# Altium PCB AC225-16A-MHCW05P-B_V1.0.PcbDoc
Units mm, origin at the board's own origin, x right, y up, seen from the top; angles counter-clockwise.
Board outline 34.42 x 23.11 mm, 2 copper layers (Top Layer, Bottom Layer); 9 components, 9 nets, 58 pads, 85 vias.
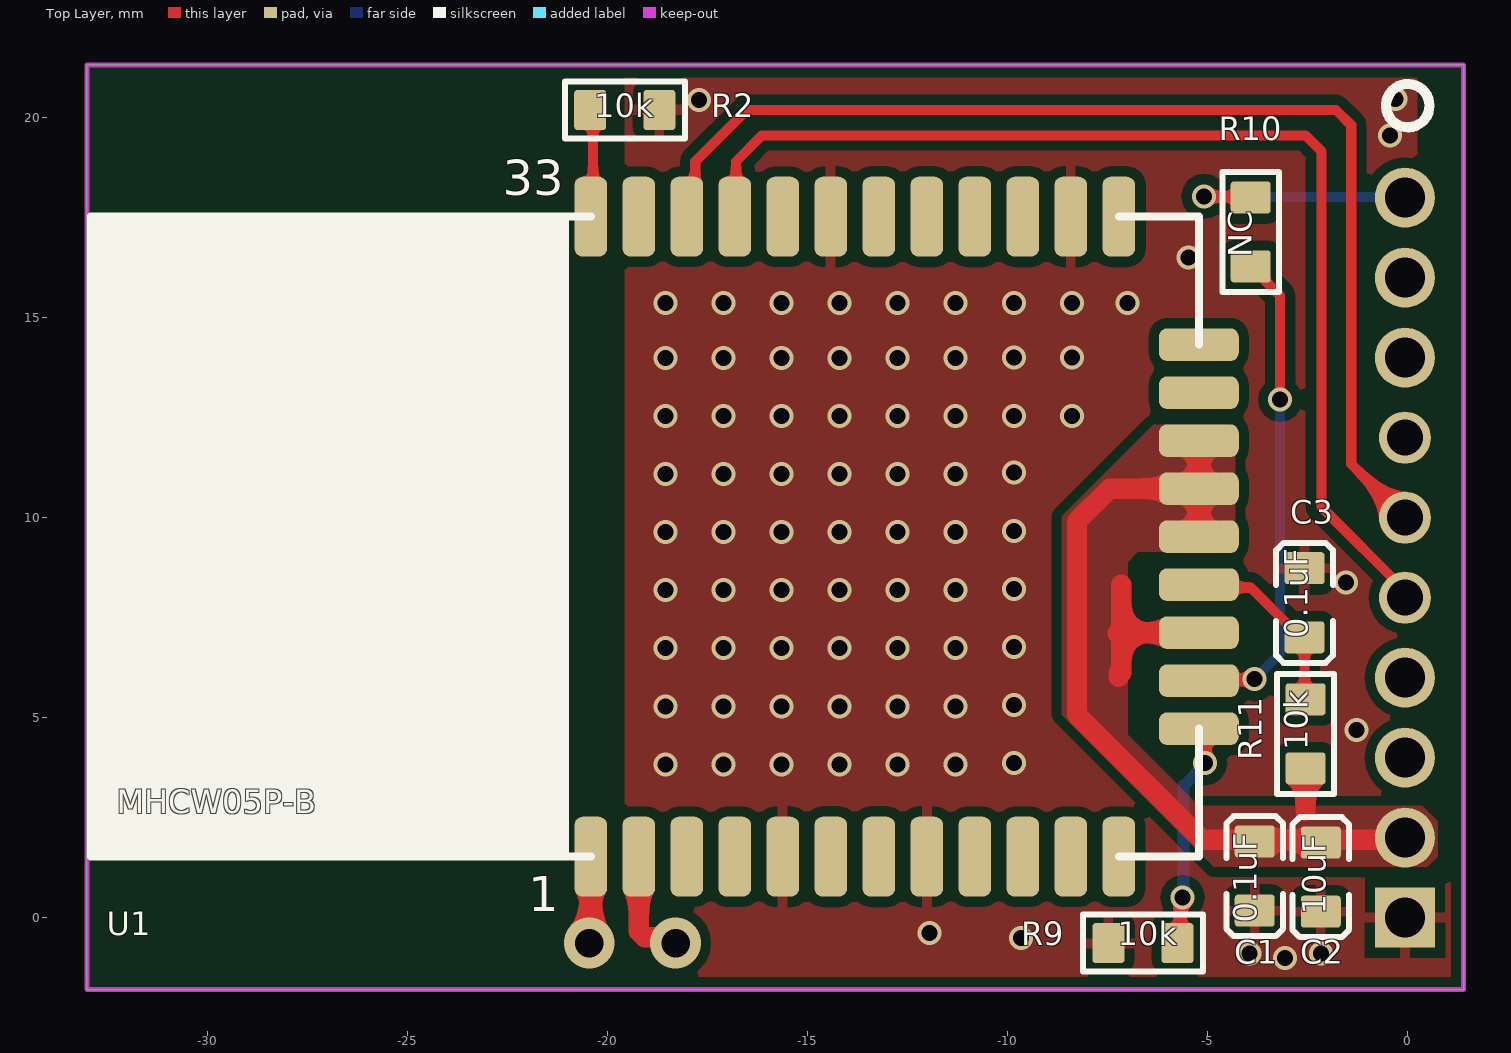
[diagram p0: Top Layer view]
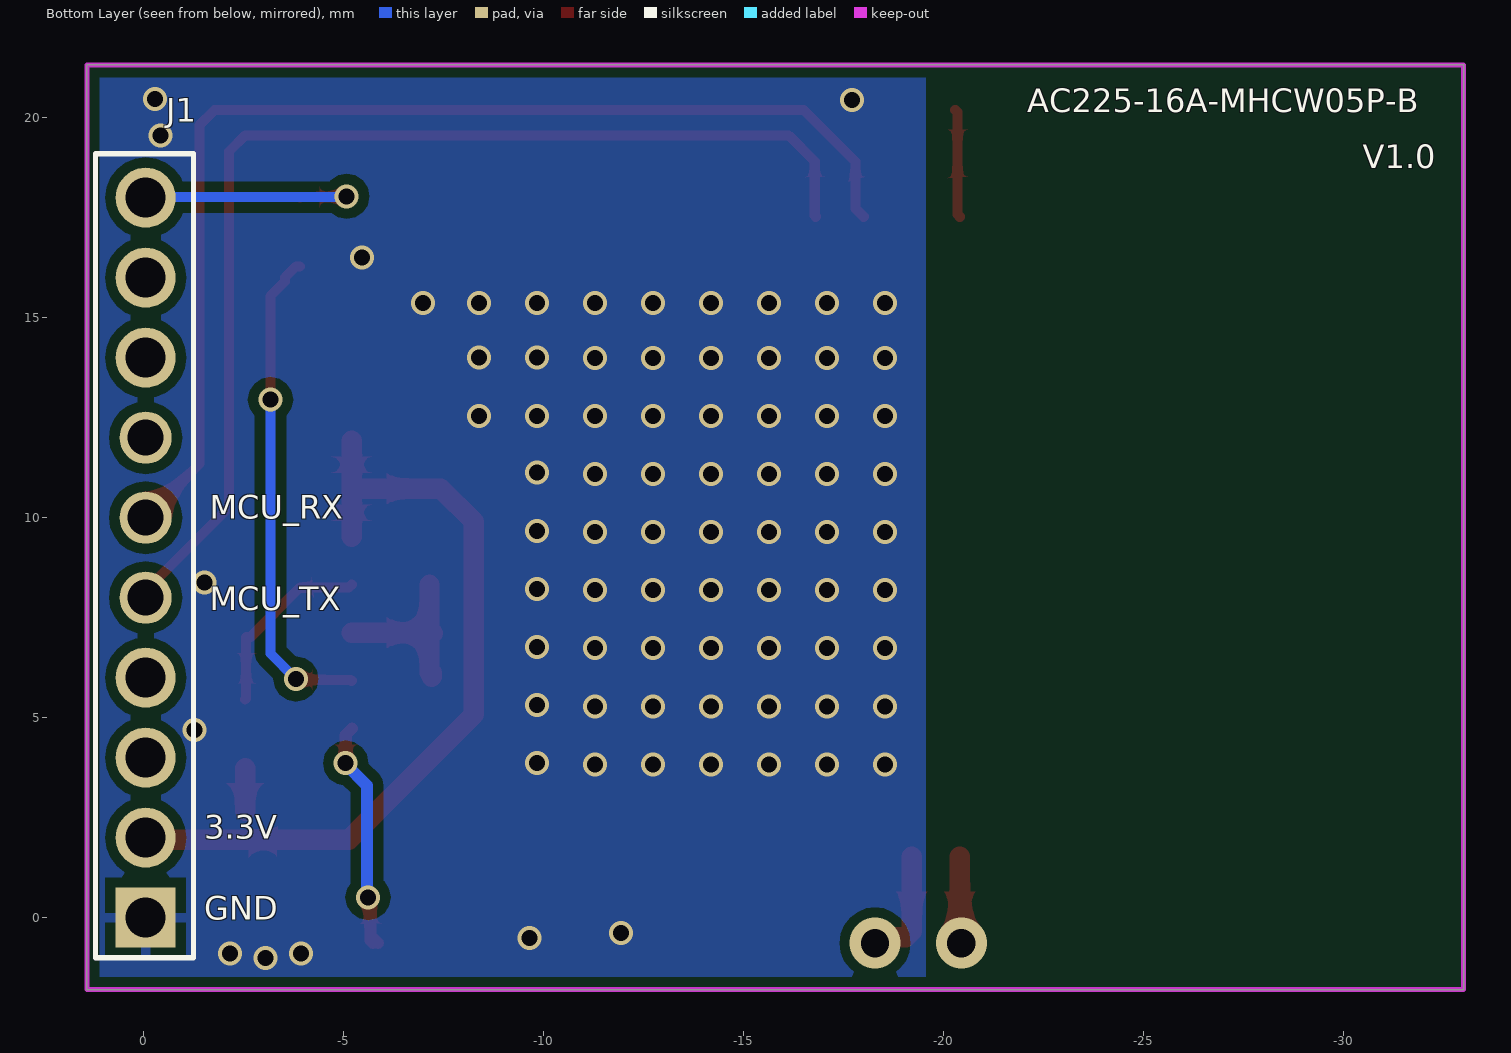
[diagram p1: Bottom Layer view, seen from below]
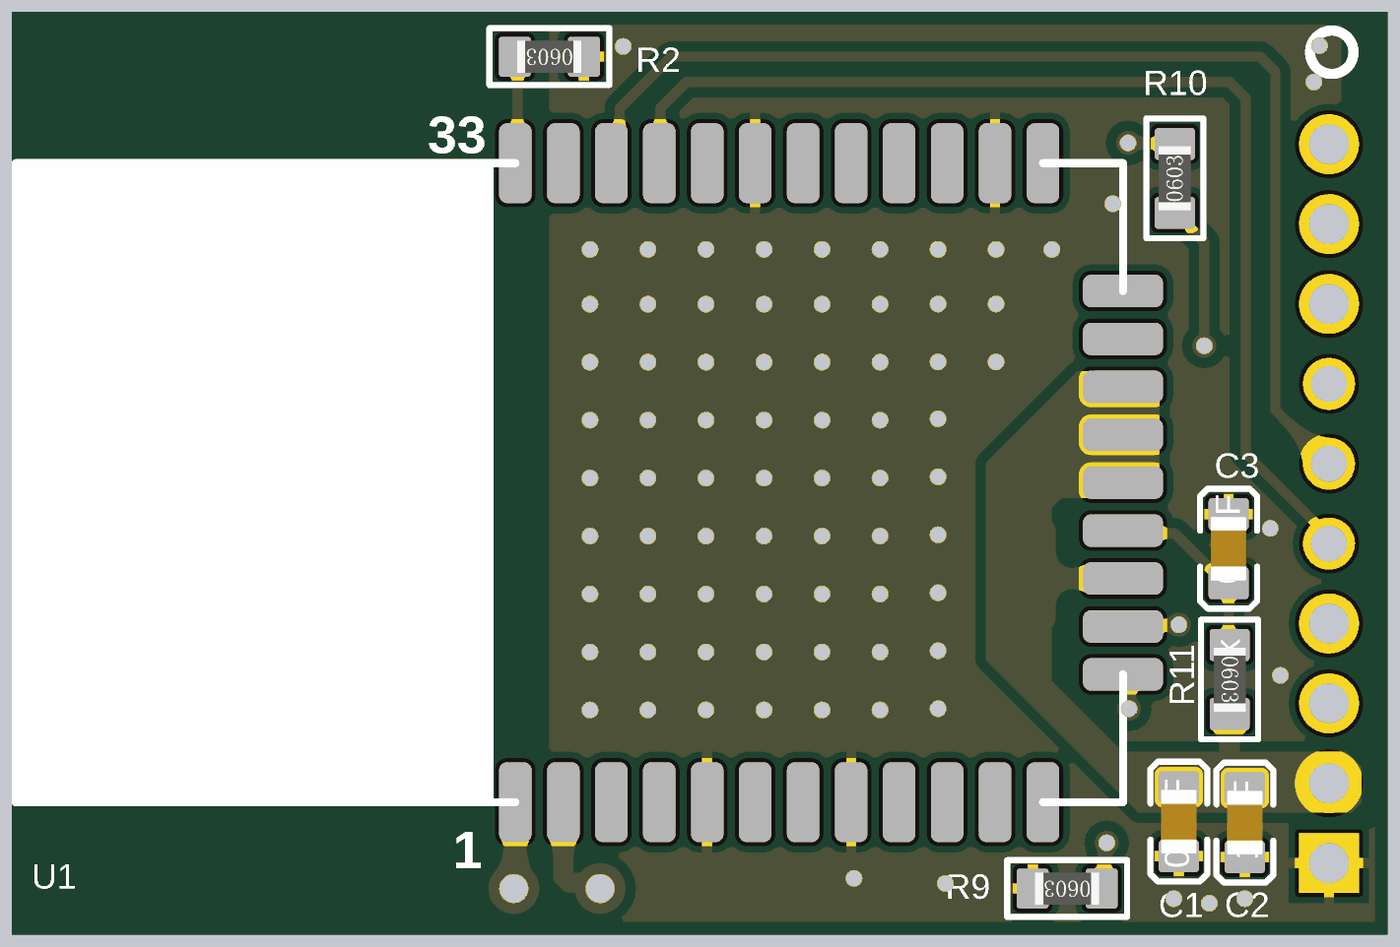
[diagram p2: 3D render of the assembled board from above, using the file's embedded part models]

## Layer stack, top to bottom
Top Solder: solder mask 0.0102, Solder Resist, Dk 3.5
Top Layer: signal copper 0.0356
Dielectric 1: dielectric 0.32, FR-4, Dk 4.8
Bottom Layer: signal copper 0.0356
Bottom Solder: solder mask 0.0102, Solder Resist, Dk 3.5

## Board outline
-33.004,-1.795 -33.004,21.319 1.413,21.319 1.413,-1.795

## Design rules (kind name [scope] priority, off if disabled: settings)
Clearance [All] p1: gap=0.254 ignorepadtopadclearanceinfootprint=FALSE except(0: Arc-Hole Track-Hole SMDPad-Hole THPad-Hole Via-Hole Fill-Hole Poly-Hole Region-Hole Text-Hole)
PolygonConnect [All] p1: connectstyle=Direct reliefconductorwidth=0.254 reliefentries=4 polygonreliefangle="90 Angle" airgapwidth=0.254
RoutingVias [All] p1: holewidth=0.711 width=1.27 viastyle="Through Hole" minholewidth=0.003 minwidth=0.003 maxholewidth=12.7 maxwidth=12.7
SolderMaskExpansion [All] p1: expansion=0.102
Width [All] p1: maxlimit=15.24 minlimit=0.254 preferedwidth=0.254
30 further rules are at their usual default settings.

## Components (designator, comment, footprint, x,y, rotation, side; value= is the part's Value field where it differs from the comment)
C1 "0.1uF" C-0603 -3.81,1.041 r270 top
C2 "10uF" C-0603 -2.159,1.016 r270 top
C3 "0.1uF" C-0603 -2.565,7.874 r90 top
J1 "CON10" DIP_10 0.946,9 r90 bottom
R2 "10k" R-0603 -19.558,20.193 r180 top
R9 "10k" R-0603 -6.604,-0.635 r180 top
R10 "NC" R-0603 -3.91,17.145 r90 top
R11 "10k" R-0603 -2.54,4.597 r270 top
U1 "MHCW05P-B" MHCW05P-B -20.408,1.526 r90 top locked

## Footprints (in the part's own frame and the unit in brackets; to place one, negate y for a bottom-side part, rotate by r counter-clockwise, add the part's x,y. Pads: shape width x height; smd on the part's side, far side on the other; paste and mask are expansions set on the pad)
C-0603 [mm]
  rrect20% 0.8x1 smd: 1(-0.864,0) 2(0.864,0)
  silkscreen extent -1.5,-0.71 1.5,0.71, body extent -0.8,-0.45 0.8,0.45, height 0.8
DIP_10 [mm]
  rect 1.5x1.5 hole 1: 1(-9,-1)
  round 1.5 hole 1: 2(-7,-1) 3(-5,-1) 4(-3,-1) 8(5,-1) 9(7,-1) 10(9,-1)
  round 1.3 hole 0.9: 5(-1,-1) 6(1,-1) 7(3,-1)
  silkscreen extent -10,-2.2 10.1,0.25
MHCW05P-B [mm]
  rrect50% 2x0.813 smd: 1(0,0) 2(0,-1.2) 3(0,-2.4) 4(0,-3.6) 5(0,-4.8) 6(0,-6) 7(0,-7.2) 8(0,-8.4) 9(0,-9.6) 10(0,-10.8) 11(0,-12) 12(0,-13.2) 22(16,-13.2) 23(16,-12) 24(16,-10.8) 25(16,-9.6) 26(16,-8.4) 27(16,-7.2) 28(16,-6) 29(16,-4.8) 30(16,-3.6) 31(16,-2.4) 32(16,-1.2) 33(16,0)
  oval 0.813x2 smd: 13(3.2,-15.2)
  rrect50% 0.813x2 smd: 13(3.2,-15.2) 14(4.4,-15.2) 15(5.6,-15.2) 16(6.8,-15.2) 17(8,-15.2) 18(9.2,-15.2) 19(10.4,-15.2) 20(11.6,-15.2) 21(12.8,-15.2)
  silkscreen extent 0,-15.2 16,12.5, body extent 0,-15.11 16,12.45, height 2
R-0603 [mm] "适用于贴片0603（1608）封装电阻 1/8W"
  rrect20% 0.8x1 smd: 1(-0.864,0) 2(0.864,0)
  silkscreen extent -1.5,-0.71 1.5,0.71, body extent -0.8,-0.4 0.8,0.4, height 0.45

## Part data
C1 C2 C3: library part CAP
R2 R9 R10 R11: library part RES2

## Via types
v1: diameter 0.6, hole 0.4, Top Layer to Bottom Layer, tented both sides, 83 vias
v2: diameter 1.27, hole 0.711, Top Layer to Bottom Layer, tented both sides, 2 vias

## Nets (pads, with @x,y where several pads share a name; then routed paths per layer and width w, separated by ;. In a path a pad name is that pad's centre, name@x,y a point inside that pad or via, vN(x,y) a via of type N, cw(c..) or ccw(c..) an arc to the next point about the centre after c; other vN are vias at no path point)
EXT_PWR_EN: J1.10 R10.2 | length 6.2
  Top Layer w0.254: v1(-5.08,18.034) -5.068,18.022 -3.923,18.022 R10.2
  Bottom Layer w0.254: v1(-5.08,18.034) -5.063,18.017 -0.071,18.017 J1.10
GND: C1.2 C2.2 C3.2 J1.1 R2.1 R9.2 U1.5 U1.8 U1.23 U1.28
  other v1: -3.048,-1.004 -3.937,-0.889 -2.159,-0.889 -9.652,-0.508 -11.938,-0.381 -18.542,3.835 -17.091,3.835 -15.639,3.835 -14.188,3.835 -12.736,3.835 -11.285,3.835 -9.833,3.867 -1.27,4.699 -18.542,5.286 -17.091,5.286 -15.639,5.286 -14.188,5.286 -12.736,5.286 -11.285,5.286 -9.833,5.319 -18.542,6.738 -17.091,6.738 -15.639,6.738 -14.188,6.738 -12.736,6.738 -11.285,6.738 -9.833,6.77 -18.542,8.189 -17.091,8.189 -15.639,8.189 -14.188,8.189 -12.736,8.189 -11.285,8.189 -9.833,8.222 -1.524,8.382 -18.542,9.641 -17.091,9.641 -15.639,9.641 -14.188,9.641 -12.736,9.641 -11.285,9.641 -9.833,9.673 -18.542,11.092 -17.091,11.092 -15.639,11.092 -14.188,11.092 -12.736,11.092 -11.285,11.092 -9.833,11.125 -18.542,12.543 -17.091,12.543 -15.639,12.543 -14.188,12.543 -12.736,12.543 -11.285,12.543 -9.833,12.549 -8.382,12.549 -18.542,13.995 -17.091,13.995 -15.639,13.995 -14.188,13.995 -12.736,13.995 -11.285,13.995 -9.833,14 -8.382,14 -18.542,15.367 -17.091,15.367 -15.639,15.367 -14.188,15.367 -12.736,15.367 -11.285,15.367 -9.833,15.367 -8.382,15.367 -6.985,15.367 -5.461,16.51 -0.429,19.558 -17.709,20.447 -0.29,20.468
NetC3_1: C3.1 R11.1 U1.16 | length 4.7
  Top Layer w0.254: U1.16 -5.137,8.255 -3.91,8.255 -2.665,7.01 C3.1 -2.565,5.486 R11.1
NetJ1_5: J1.5 U1.30 | length 28.5
  Top Layer w0.254: U1.30 -16.78,17.554 -16.78,18.907 -16.129,19.558 -2.54,19.558 -2.137,19.155 -2.137,10.265 -0.054,8.182 J1.5
NetJ1_6: J1.6 U1.31 | length 28.9
  Top Layer w0.254: U1.31 -17.796,17.738 -17.796,18.907 -16.51,20.193 -1.778,20.193 -1.397,19.812 -1.397,11.343 J1.6
NetR2_2: R2.2 U1.33 | length 2.7
  Top Layer w0.254: U1.33 -20.352,17.582 -20.352,20.137 R2.2@-20.295,20.193
NetR9_1: R9.1 U1.13 | length 6
  Top Layer w0.3: R9.1@-5.867,-0.635 R9.1@-5.671,-0.438 ; R9.1 -5.671,-0.565 R9.1@-5.671,-0.438 ; v1(-5.613,0.508) -5.671,0.451 R9.1@-5.671,-0.438 ; U1.13@-5.208,4.726 -5.055,4.573 v1(-5.055,3.867)
  Bottom Layer w0.3: v1@-5.588,0.508 -5.588,3.302 -5.055,3.835 v1(-5.055,3.867)
NetR10_1: R10.1 U1.14 | length 12.4
  Top Layer w0.254: U1.14 -5.186,5.948 -3.831,5.948 v1(-3.81,5.969) ; R10.1 -3.81,16.281 -3.537,16.008 -3.537,15.908 -3.175,15.546 v1(-3.175,12.954)
  Bottom Layer w0.254: v1(-3.81,5.969) -3.175,6.604 v1(-3.175,12.954)
P3V3: C1.1 C2.1 J1.2 R11.2 U1.15 U1.17 U1.18 U1.19 | length 25.6
  Top Layer w0.508: -7.239,7.112 -7.225,7.126 -7.148,7.126 ; -7.208,6.022 -7.208,6.122 -7.148,6.122 -7.148,7.126 ; -7.148,8.326 -7.148,7.126 ; U1.15 -7.148,7.126 ; U1.17 U1.18 ; U1.19 U1.18 ; -2.54,2.667 R11.2 ; J1.2 -0.101,1.953 -2.159,1.953 -3.81,1.953 -5.128,1.953 -8.255,5.08 -8.255,9.906 -7.435,10.726 U1.18
pads on no net: J1.3 J1.4 J1.7 J1.8 J1.9 U1.1 U1.2 U1.3 U1.4 U1.6 U1.7 U1.9 U1.10 U1.11 U1.12 U1.20 U1.21 U1.22 U1.24 U1.25 U1.26 U1.27 U1.29 U1.32
copper on no net: | length 5.2
  Top Layer w0.508: v2(-20.447,-0.635) -20.447,-0.489 -20.408,-0.45 -20.408,-0.236 -20.408,1.526 ; -19.208,1.526 -19.208,-0.337 -19.056,-0.489 -18.434,-0.489 v2(-18.288,-0.635)
  Bottom Layer w0.508: v2(-20.447,-0.635) v2@-20.32,-0.635

## Polygon pours and split planes (outlines as drawn)
GND on Top Layer "GND_L01_P004" (solid, remove dead copper, pour order 4): -19.558,21.319 0.254,21.319 0.254,1.016 1.413,1.016 1.413,-1.795 -19.558,-1.795
P3V3 on Top Layer "P3V3_L01_P000" (solid, remove dead copper, pour order 0): -6.35,12.319 -8.636,10.033 -8.636,5.08 -4.826,1.27 0.508,1.27 0.762,1.524 0.762,2.413 0.381,2.794 -5.207,2.794 -6.985,4.572 -6.985,8.89 -6.731,9.144 -4.572,9.144 -4.293,9.423 -4.293,12.167 -4.445,12.319
GND on Bottom Layer "GND_L02_P002" (solid, remove dead copper, pour order 2): -19.558,21.319 -19.558,-1.795 1.413,-1.795 1.413,21.319

## Keep-outs
Keep-Out Layer:
  lines w0.1: -33.004,-1.795 1.413,-1.795 1.413,21.319 -33.004,21.319 -33.004,-1.795
  lines w0.127: -33.004,-1.795 -33.004,21.319 1.413,21.319 1.413,-1.795 -33.004,-1.795

## Silkscreen, mask and mechanical layers (free items; w line width, h text height)
Top Overlay:
  circle w0.254: c0.016,20.303 r0.543
  rectangle: -32.932,1.524 -20.955,17.526
  text "33" at -22.606,17.78 h1.5
  text "1" at -21.971,-0.127 h1.5
Bottom Overlay:
  text "AC225-16A-MHCW05P-B" at -22.098,19.939 h1
  text "V1.0" at -30.48,18.542 h1
  text "MCU_RX" at -1.651,9.779 h1
  text "MCU_TX" at -1.651,7.493 h1
  text "3.3V" at -1.524,1.778 h1
  text "GND" at -1.524,-0.254 h1

## Dimensions
-33.004,21.319 to 1.413,21.319 on Mechanical 1
-33.004,21.319 to -33.004,-1.795 on Mechanical 1